# Altium PCB WCH_TOUCH_Kit_EX002.PcbDoc
Units mil, origin at the board's own origin, x right, y up, seen from the top; angles counter-clockwise.
Board outline 2599.76 x 3002.87 mil, 2 copper layers (Top Layer, Bottom Layer); 23 components, 18 nets, 70 pads, 22 vias.
Unrouted connection lines stored in the file: 1.
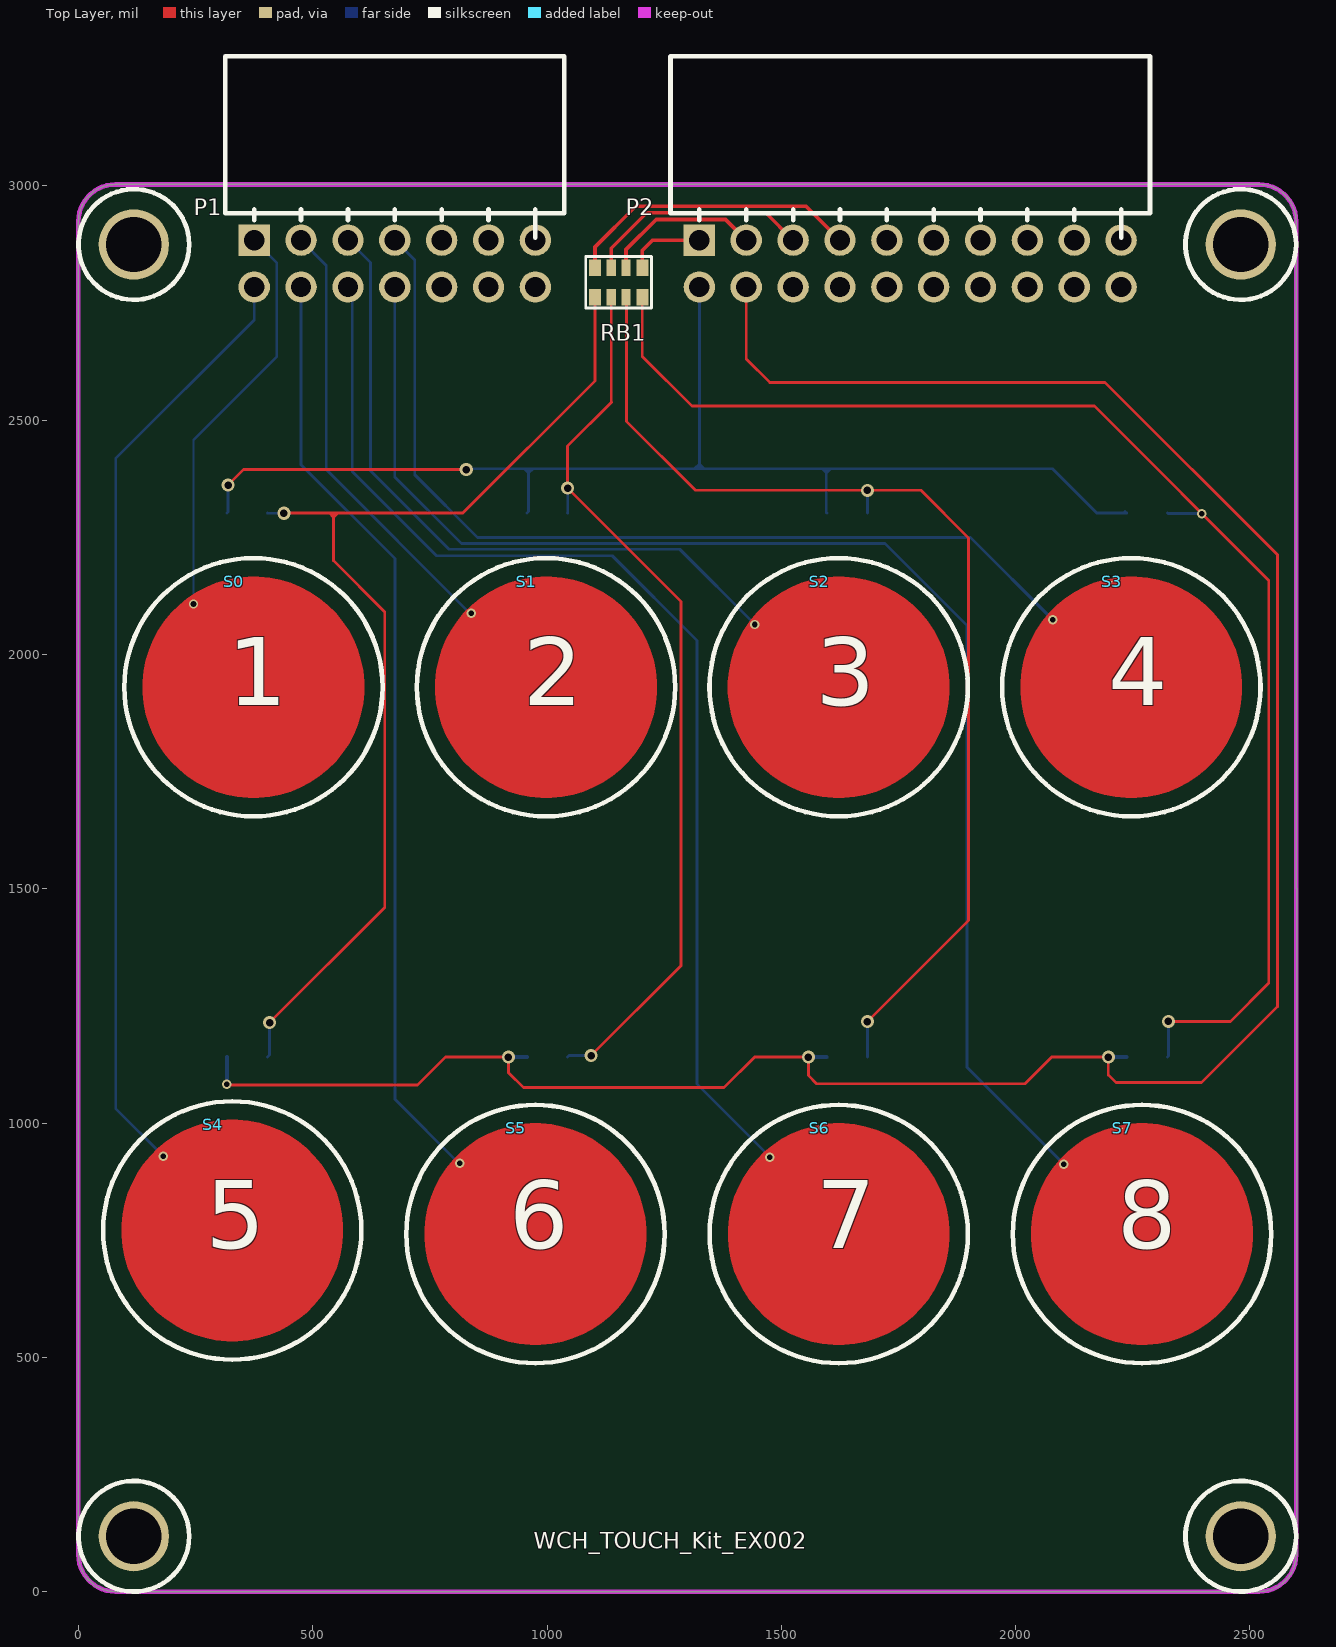
[diagram p0: Top Layer view]
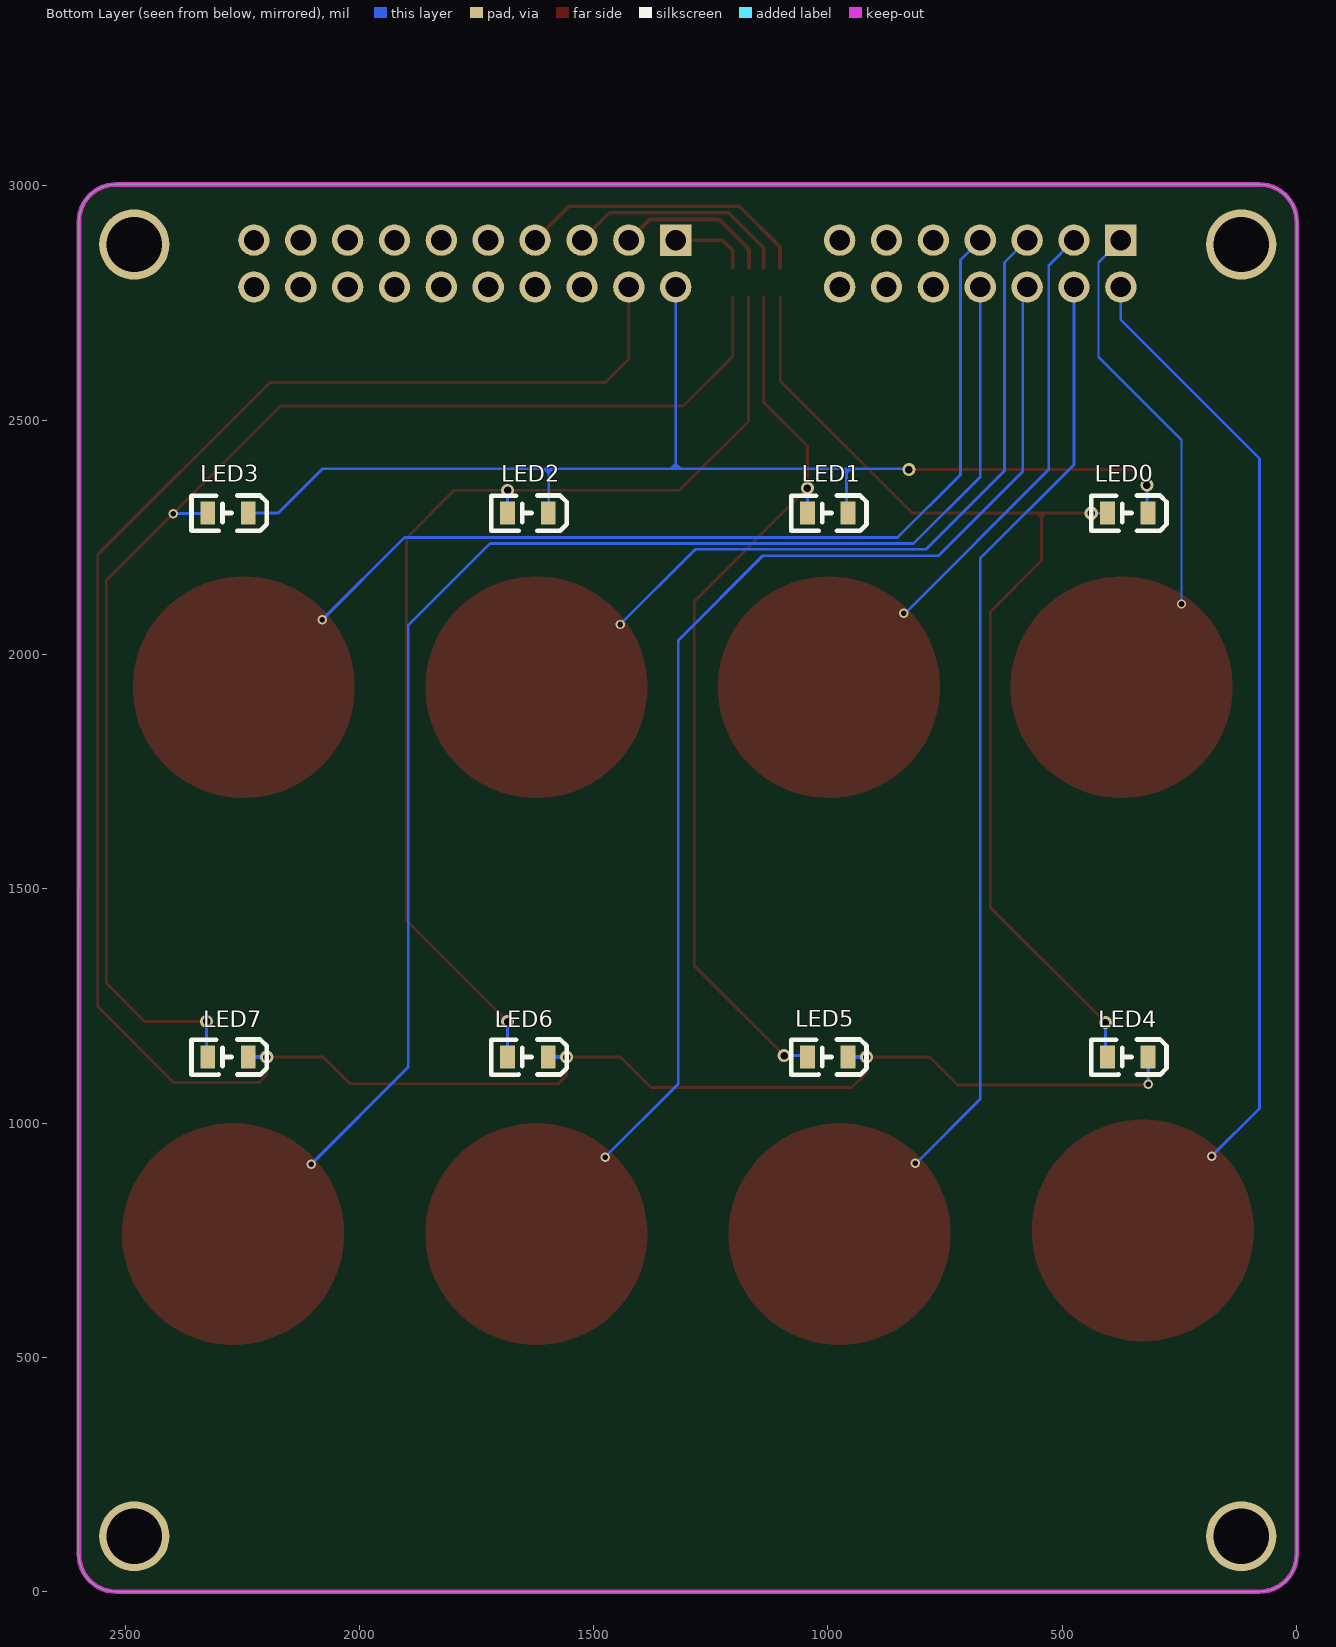
[diagram p1: Bottom Layer view, seen from below]

## Layer stack, top to bottom
Top Solder: solder mask 0.4, Solder Resist, Dk 3.5
Top Layer: signal copper 1.4
Dielectric 1: dielectric 12.6, FR-4, Dk 4.8
Bottom Layer: signal copper 1.4
Bottom Solder: solder mask 0.4, Solder Resist, Dk 3.5

## Board outline
-0.19,79.06 -0.01,2924.06 0,2924.13 cw(c78.74,2924.13) 78.74,3002.87 2519.68,3002.87 cw(c2519.68,2924.13) 2598.43,2924.13 2598.52,2924.06 2599.57,76.76 2598.43,78.74 cw(c2519.68,78.74) 2519.68,0 78.74,0 cw(c78.74,78.74)

## Design rules (kind name [scope] priority, off if disabled: settings)
Clearance Clearance_1 [InPolygon] p1: gap=10 ignorepadtopadclearanceinfootprint=FALSE
Clearance [All] p2: gap=6 ignorepadtopadclearanceinfootprint=FALSE except(5: Fill-Fill Fill-Poly Fill-Region Poly-Poly Poly-Region Region-Region; 8: Arc-Via Track-Via SMDPad-Via THPad-Via Via-Via Via-Fill Via-Poly Via-Region Via-Hole)
ComponentClearance [All] p1 off: gap=10 collisioncheckmode=3 verticalgap=10 showdistances=FALSE
DiffPairsRouting [All] p1: maxlimit=10 minlimit=7 mostfreqgap=8 toplayer_minwidth=6 toplayer_maxwidth=15 toplayer_prefwidth=8 bottomlayer_minwidth=6 bottomlayer_maxwidth=15 bottomlayer_prefwidth=8 maxuncoupledlength=500
MinimumSolderMaskSliver [All] p1 off: minsoldermaskwidth=10
PolygonConnect PolygonConnect_1 [IsVia] p1: connectstyle=Direct reliefconductorwidth=10 reliefentries=4 polygonreliefangle="90 Angle" airgapwidth=10
PolygonConnect [All] p2: connectstyle=Relief reliefconductorwidth=20 reliefentries=4 polygonreliefangle="90 Angle" airgapwidth=10
RoutingVias [All] p1: holewidth=16 width=28 viastyle="Through Hole" minholewidth=12 minwidth=20 maxholewidth=28 maxwidth=50
SilkToSilkClearance [All] p1 off: silktosilkclearance=10
SilkToSolderMaskClearance [IsPad] p1 off: minsilkscreentomaskgap=10 clearancetoexposedcopper=TRUE
SolderMaskExpansion [All] p1: expansion=2 istentingtop=FALSE
Width [All] p1: maxlimit=100 minlimit=4.44 preferedwidth=10
25 further rules are at their usual default settings.

## Classes and differential pairs
component class WCH_TOUCH_Kit_EX002: LED0 LED1 LED2 LED3 LED4 LED5 LED6 LED7 P1 P2 RB1 S0 S1 S2 S3 S4 S5 S6 S7

## Components (designator, comment, footprint, x,y, rotation, side; value= is the part's Value field where it differs from the comment)
LED0 "" LED0805-RD_EH 360.24,2301.57 r0 bottom
LED1 "" LED0805-RD_EH 1000.29,2301.57 r0 bottom
LED2 "" LED0805-RD_EH 1640.35,2301.57 r0 bottom
LED3 "" LED0805-RD_EH 2280.4,2301.57 r0 bottom
LED4 "" LED0805-RD_EH 360.24,1140.77 r0 bottom
LED5 "" LED0805-RD_EH 1000.29,1140.77 r0 bottom
LED6 "" LED0805-RD_EH 1640.35,1140.77 r0 bottom
LED7 "" LED0805-RD_EH 2280.4,1140.77 r0 bottom
P1 "Header 7X2" HDR-TH_14P-P2.54-H-F-R2-C10-W8.5 375,2884.02 r0 top
P2 "Header 10X2" HDR-TH_20P-P2.54-H-F-R2-C10-W8.5 1325,2884.02 r0 top
RB1 "RB-8P4R" RCA-8P4R-0603 1152.7,2794.05 r180 top
S0 "TK" TOUCHKEY-12mm-S 373.4,1929.97 r0 top
S1 "TK" TOUCHKEY-12mm-S 997.84,1929.97 r0 top
S2 "TK" TOUCHKEY-12mm-S 1622.29,1929.97 r0 top
S3 "TK" TOUCHKEY-12mm-S 2246.73,1929.97 r0 top
S4 "TK" TOUCHKEY-12mm-S 328.07,770.73 r0 top
S5 "TK" TOUCHKEY-12mm-S 975.19,763.08 r0 top
S6 "TK" TOUCHKEY-12mm-S 1622.32,763.08 r0 top
S7 "TK" TOUCHKEY-12mm-S 2269.44,763.08 r0 top
? "Comment" HOLE 118.11,118.11 r0 top
? "Comment" HOLE 2480.31,2874.76 r0 top
? "Comment" HOLE 2480.31,118.11 r0 top
? "Comment" HOLE 118.11,2874.76 r0 top

## Footprints (in the part's own frame and the unit in brackets; to place one, negate y for a bottom-side part, rotate by r counter-clockwise, add the part's x,y. Pads: shape width x height; smd on the part's side, far side on the other; paste and mask are expansions set on the pad)
HDR-TH_14P-P2.54-H-F-R2-C10-W8.5 [mm]
  rect 1.7x1.7 hole 1.1 paste+0 mask+0.05: 1(0,0)
  round 1.7 hole 1.1 paste+0 mask+0.05: 2(0,-2.54) 3(2.54,0) 4(2.54,-2.54) 5(5.08,0) 6(5.08,-2.54) 7(7.62,0) 8(7.62,-2.54) 9(10.16,0) 10(10.16,-2.54) 11(12.7,0) 12(12.7,-2.54) 13(15.24,0) 14(15.24,-2.54)
  silkscreen extent -1.57,0.13 16.81,9.96
HDR-TH_20P-P2.54-H-F-R2-C10-W8.5 [mm]
  rect 1.7x1.7 hole 1.1 paste+0 mask+0.05: 1(0,0)
  round 1.7 hole 1.1 paste+0 mask+0.05: 2(0,-2.54) 3(2.54,0) 4(2.54,-2.54) 5(5.08,0) 6(5.08,-2.54) 7(7.62,0) 8(7.62,-2.54) 9(10.16,0) 10(10.16,-2.54) 11(12.7,0) 12(12.7,-2.54) 13(15.24,0) 14(15.24,-2.54) 15(17.78,0) 16(17.78,-2.54) 17(20.32,0) 18(20.32,-2.54) 19(22.86,0) 20(22.86,-2.54)
  silkscreen extent -1.57,0.13 24.43,9.96
HOLE [mm]
  round 3.81 hole 3: 0(0,0)
  silkscreen extent -3,-3 3,3
LED0805-RD_EH [mm]
  rect 0.8x1.25 smd: 1(1.1,0) 2(-1.1,0)
  silkscreen extent -2.1,-0.95 1.98,0.96
RCA-8P4R-0603 [mm]
  rect 0.65x0.9 smd mask+0.051: 1(-1.28,-0.8) 4(1.28,-0.8) 5(1.28,0.8) 8(-1.28,0.8)
  rect 0.5x0.9 smd mask+0.051: 2(-0.4,-0.8) 3(0.4,-0.8) 6(0.4,0.8) 7(-0.4,0.8)
  silkscreen extent -1.78,-1.4 1.78,1.4, body extent -1.6,-0.8 1.6,0.8, height 0.6
TOUCHKEY-12mm-S [mil]
  round 3 smd mask+0: 1(-41.97,225.3)
  Top Layer region: 34.7,233.95 57.47,229.42 79.68,222.68 101.12,213.8 121.59,202.86 140.89,189.96 158.83,175.24 175.24,158.83 189.96,140.89 202.86,121.59 213.8,101.12 222.68,79.68 229.42,57.47 233.95,34.7 236.22,11.6 236.22,-11.6 233.95,-34.7 229.42,-57.47 222.68,-79.68 213.8,-101.12 202.86,-121.59 189.96,-140.89 175.24,-158.83 158.83,-175.24 140.89,-189.96 121.59,-202.86 101.12,-213.8 79.68,-222.68 57.47,-229.42 34.7,-233.95 11.6,-236.22 -11.61,-236.22 -34.7,-233.95 -57.47,-229.42 -79.68,-222.68 -101.12,-213.8 -121.59,-202.86 -140.89,-189.96 -158.83,-175.24 -175.24,-158.83 -189.96,-140.89 -202.86,-121.59 -213.8,-101.12 -222.68,-79.68 -229.42,-57.47 -233.95,-34.7 -236.22,-11.6 -236.22,0 -236.22,0 -236.22,0 -236.22,11.6 -233.95,34.7 -229.42,57.47 -222.68,79.68 -213.8,101.12 -202.86,121.59 -189.96,140.89 -175.24,158.83 -158.83,175.24 -140.89,189.96 -121.59,202.86 -101.12,213.8 -79.68,222.68 -57.47,229.42 -34.7,233.95 -11.61,236.22 11.6,236.22
  silkscreen extent -276,-276 276,276

## Part data
LED0 LED1 LED2 LED3 LED4 LED5 LED6 LED7: library part LED3, "Typical BLUE SiC LED", DatasheetVersion=16-Apr-2002, LatestRevisionDate=17-Dec-2003, LatestRevisionNote="PCB Footprint replaced.", PackageDescription="SM LED; 2 C-Bend Leads; Body 3.5 x 2.8 x 1.9 mm, inc leads (LxWxH typ)", PackageReference=3.5X2.8X1.9, PackageVersion=16-Apr-2002, Published=8-Jun-2000, Publisher="Altium Limited"
P1: "Header, 7-Pin, Dual row", LatestRevisionDate=17-Jul-2002, LatestRevisionNote="Re-released for DXP Platform.", Publisher="Altium Limited"
P2: "Header, 10-Pin, Dual row", LatestRevisionDate=17-Jul-2002, LatestRevisionNote="Re-released for DXP Platform.", Publisher="Altium Limited"
RB1: "贴片网络排阻"

## Via types
v1: diameter 28, hole 16, Top Layer to Bottom Layer, tented both sides, 12 vias
v2: diameter 20, hole 12, Top Layer to Bottom Layer, tented both sides, 10 vias

## Nets (pads, with @x,y where several pads share a name; then routed paths per layer and width w, separated by ;. In a path a pad name is that pad's centre, name@x,y a point inside that pad or via, vN(x,y) a via of type N, cw(c..) or ccw(c..) an arc to the next point about the centre after c; other vN are vias at no path point)
COM1: LED0.2 LED1.2 LED2.2 LED3.2 P2.2 | length 2696.2
  Top Layer w6: v1(319.37,2361.33) 352.44,2394.4 v1(827.37,2394.4)
  Bottom Layer w6: LED0.2 319.37,2304.01 v1(319.37,2361.33) ; v1(827.37,2394.4) 829.19,2396.22 951.47,2396.22 ; LED1.2 960.66,2305.25 960.66,2387.03 ; P2.2 1325,2406.33 ; LED2.2 1595.8,2302.81 1595.8,2387.09 ; LED3.2@2233.54,2305.13 LED3.2 2173.1,2301.57 2078.45,2396.22 1604.94,2396.22 ; 951.47,2396.22 960.66,2396.22 ; 951.47,2396.22 960.66,2387.03 ; 960.66,2387.03 960.66,2396.22 ; 960.66,2387.03 969.85,2396.22 ; 960.66,2396.22 969.85,2396.22 ; 969.85,2396.22 1314.89,2396.22 ; 1314.89,2396.22 1323.09,2396.22 ; 1314.89,2396.22 1325,2406.33 ; 1323.09,2396.22 1335.11,2396.22 ; 1323.09,2396.22 1325,2398.13 1325,2406.33 ; 1325,2406.33 1335.11,2396.22 ; 1335.11,2396.22 1587.61,2396.22 ; 1587.61,2396.22 1595.8,2396.22 ; 1587.61,2396.22 1595.8,2388.03 ; 1595.8,2387.09 1595.8,2388.03 ; 1595.8,2387.09 1604.94,2396.22 ; 1595.8,2388.03 1595.8,2396.22 ; 1595.8,2396.22 1604.94,2396.22
COM2: LED4.2 LED5.2 LED6.2 LED7.2 P2.4 | length 5123.5
  Top Layer w6: v2(316.7,1083.02) 318.63,1081.09 723.73,1081.09 783.4,1140.77 v1(917.61,1140.77) 917.61,1107.29 949.4,1075.5 1377.75,1075.5 1443.01,1140.77 v1(1557.66,1140.77) 1557.66,1101.27 1575.05,1083.88 2020.03,1083.88 2076.92,1140.77 v1(2197.72,1140.77) 2197.72,1102.39 2213.76,1086.35 2396.51,1086.35 2558.41,1248.25 2558.41,2212.55 2190.61,2580.35 1475.32,2580.35 1425,2630.67 P2.4
  Bottom Layer w8: v2(316.7,1083.02) 316.7,1140.54 LED4.2 ; v1(917.61,1140.77) LED5.2 ; v1(1557.66,1140.77) LED6.2 ; v1(2197.72,1140.77) LED7.2
SEG0: P2.7 RB1.4 | length 632.5
  Top Layer w8: RB1.4 1102.31,2869.44 1189.16,2956.29 1552.73,2956.29 P2.7
SEG1: P2.5 RB1.3 | length 484.6
  Top Layer w8: RB1.3 1136.95,2866.55 1212.7,2942.29 1466.73,2942.29 P2.5
SEG2: P2.3 RB1.2 | length 339.9
  Top Layer w8: RB1.2 1168.45,2863.91 1232.83,2928.29 1380.73,2928.29 P2.3
SEG3: P2.1 RB1.1 | length 167.6
  Top Layer w8: RB1.1 1203.1,2862.15 1224.97,2884.02 P2.1
SEG_0: LED0.1 LED4.1 RB1.5 | length 2330.2
  Top Layer w6: v1(407.82,1214.3) 653.71,1460.2 653.71,2090.81 544.5,2200.02 544.5,2292.52 ; v1(438.19,2301.18) 438.58,2301.57 535.44,2301.57 ; 553.83,2301.57 553.55,2301.57 ; RB1.5 1101.94,2762.18 1101.94,2583.55 819.97,2301.57 553.55,2301.57 ; 535.44,2301.57 544.5,2301.57 ; 535.44,2301.57 544.5,2292.52 ; 544.5,2292.52 544.5,2301.57 ; 544.5,2292.52 553.55,2301.57 ; 544.5,2301.57 553.55,2301.57
  Bottom Layer w6: LED4.1 407.82,1145.04 v1(407.82,1214.3) ; LED0.1 403.94,2301.18 v1(438.19,2301.18)
SEG_1: LED1.1 LED5.1 RB1.6 | length 1942
  Top Layer w6: v1(1093.78,1143.91) 1285.44,1335.58 1285.44,2112.93 1043.6,2354.78 1043.6,2444.49 1137.26,2538.16 1136.95,2538.47 RB1.6
  Bottom Layer w6: LED5.1 1046.74,1143.91 v1(1093.78,1143.91) ; LED1.1 1043.92,2301.9 v1(1043.92,2354.78)
SEG_2: LED2.1 LED6.1 RB1.7 | length 2344.5
  Top Layer w6: RB1.7 1169.31,2761.69 1169.31,2497.33 1316.48,2350.17 v1(1683.65,2350.17) 1797.86,2350.17 1899.36,2248.66 1899.36,1432.15 v1(1683.58,1216.37)
  Bottom Layer w6: v1(1683.58,1216.37) 1683.58,1140.84 LED6.1 ; LED2.1 v1(1683.65,2350.17)
SEG_3: LED3.1 LED7.1 RB1.8 | length 2919.9
  Top Layer w6: RB1.8 1203.1,2635.88 1309.18,2529.8 2167.99,2529.8 2540.14,2157.65 2540.14,1298.61 2458.31,1216.79 v1(2326,1216.79)
  Bottom Layer w6: LED7.1 2326,1143.06 v1(2326,1216.79) ; LED3.1 2324.78,2300.5 v2(2397.29,2300.5)
TS0: P1.1 S0.1 | length 869.7
  Bottom Layer w5: v2(245.4,2107.57) 245.4,2457.57 422.76,2634.93 422.76,2836.26 P1.1
TS1: P1.2 S4.1 | length 2019.8
  Bottom Layer w6: v2(181.24,928.9) 79.35,1030.8 79.35,2418.34 375,2713.99 P1.2
TS2: P1.3 S1.1 | length 956.8
  Bottom Layer w6: P1.3@475,2892.53 P1.3 528.72,2830.3 528.72,2394.38 835.55,2087.55 v2(838.06,2087.55)
TS3: P1.4 S5.1 | length 2011.5
  Bottom Layer w6: P1.4 475,2404.58 675.18,2204.4 675.18,1050.56 811.32,914.42 v2(813.9,914.42)
TS4: P1.5 S2.1 | length 1468.3
  Bottom Layer w6: P1.5 623.03,2836 623.03,2391.95 790.62,2224.35 1283.04,2224.35 v2(1443.46,2063.93)
TS5: P1.6 S6.1 | length 2449.6
  Bottom Layer w6: P1.6 584.31,2774.72 584.31,2390.17 764.03,2210.44 1139.1,2210.44 1319.59,2029.95 1319.59,1083.14 v2(1475.54,927.2)
TS6: P1.7 S3.1 | length 2008.1
  Bottom Layer w6: P1.7 717.46,2841.56 717.46,2383.52 851.24,2249.74 1903.34,2249.74 v2(2079.23,2073.85)
TS7: P1.8 S7.1 | length 2993.1
  Bottom Layer w6: P1.8 675,2378.65 817.16,2236.5 1721.34,2236.5 1895.85,2061.98 1895.85,1118.88 v2(2102.76,911.97)
pads on no net: ?.0 P1.9 P1.10 P1.11 P1.12 P1.13 P1.14 P2.6 P2.8 P2.9 P2.10 P2.11 P2.12 P2.13 P2.14 P2.15 P2.16 P2.17 P2.18 P2.19 P2.20

## Keep-outs
Keep-Out Layer:
  lines w10: -0.19,78.93 ccw(c78.74,78.93) 78.74,0 2519.68,0 ccw(c2519.68,78.74) 2598.43,78.74 2598.43,2924.13 ccw(c2519.68,2924.13) 2519.68,3002.87 78.74,3002.87 ccw(c78.74,2923.94) -0.19,2923.94 -0.19,78.93

## Silkscreen, mask and mechanical layers (free items; w line width, h text height)
Top Overlay:
  text "1" at 319.01,1843.51 h250
  text "2" at 949.42,1843.51 h250
  text "3" at 1573.84,1843.51 h250
  text "4" at 2197.05,1843.51 h250
  text "5" at 271.59,685.05 h250
  text "6" at 919.7,685.05 h250
  text "7" at 1574.54,685.05 h250
  text "8" at 2217.05,685.05 h250
  text "WCH_TOUCH_Kit_EX002" at 971.48,91.43 h35
Mechanical 1:
  lines w6: 333.63,1121.53 ccw(c340.97,1121.53) 340.97,1114.2 378.23,1114.2 ccw(c378.23,1122.8) 386.83,1122.8 386.83,1159.93 ccw(c379.33,1159.93) 379.33,1167.43 340.7,1167.43 ccw(c340.7,1160.36) 333.63,1160.36 333.63,1121.53 ; 333.63,2282.33 ccw(c340.97,2282.33) 340.97,2275 378.23,2275 ccw(c378.23,2283.6) 386.83,2283.6 386.83,2320.73 ccw(c379.33,2320.73) 379.33,2328.23 340.7,2328.23 ccw(c340.7,2321.17) 333.63,2321.17 333.63,2282.33 ; 973.69,1121.53 ccw(c981.02,1121.53) 981.02,1114.2 1018.29,1114.2 ccw(c1018.29,1122.8) 1026.89,1122.8 1026.89,1159.93 ccw(c1019.39,1159.93) 1019.39,1167.43 980.75,1167.43 ccw(c980.75,1160.36) 973.69,1160.36 973.69,1121.53 ; 973.69,2282.33 ccw(c981.02,2282.33) 981.02,2275 1018.29,2275 ccw(c1018.29,2283.6) 1026.89,2283.6 1026.89,2320.73 ccw(c1019.39,2320.73) 1019.39,2328.23 980.75,2328.23 ccw(c980.75,2321.17) 973.69,2321.17 973.69,2282.33 ; 1613.74,1121.53 ccw(c1621.08,1121.53) 1621.08,1114.2 1658.34,1114.2 ccw(c1658.34,1122.8) 1666.94,1122.8 1666.94,1159.93 ccw(c1659.44,1159.93) 1659.44,1167.43 1620.81,1167.43 ccw(c1620.81,1160.36) 1613.74,1160.36 1613.74,1121.53 ; 1613.74,2282.33 ccw(c1621.08,2282.33) 1621.08,2275 1658.34,2275 ccw(c1658.34,2283.6) 1666.94,2283.6 1666.94,2320.73 ccw(c1659.44,2320.73) 1659.44,2328.23 1620.81,2328.23 ccw(c1620.81,2321.17) 1613.74,2321.17 1613.74,2282.33 ; 2253.79,1121.53 ccw(c2261.13,1121.53) 2261.13,1114.2 2298.39,1114.2 ccw(c2298.39,1122.8) 2306.99,1122.8 2306.99,1159.93 ccw(c2299.49,1159.93) 2299.49,1167.43 2260.86,1167.43 ccw(c2260.86,1160.36) 2253.79,1160.36 2253.79,1121.53 ; 2253.79,2282.33 ccw(c2261.13,2282.33) 2261.13,2275 2298.39,2275 ccw(c2298.39,2283.6) 2306.99,2283.6 2306.99,2320.73 ccw(c2299.49,2320.73) 2299.49,2328.23 2260.86,2328.23 ccw(c2260.86,2321.17) 2253.79,2321.17 2253.79,2282.33
  lines w10: -0.19,79.06 -0.01,2924.06 ; 0,78.74 ccw(c78.74,78.74) 78.74,0 2519.68,0 ; 0,2924.13 cw(c78.74,2924.13) 78.74,3002.87 2519.68,3002.87 cw(c2519.68,2924.13) 2598.43,2924.13 ; 2520.83,0 ccw(c2520.83,78.74) 2599.57,78.74 ; 2598.52,2924.06 2599.57,76.76